# EAGLE board esplash (EAGLE 9.2.2)
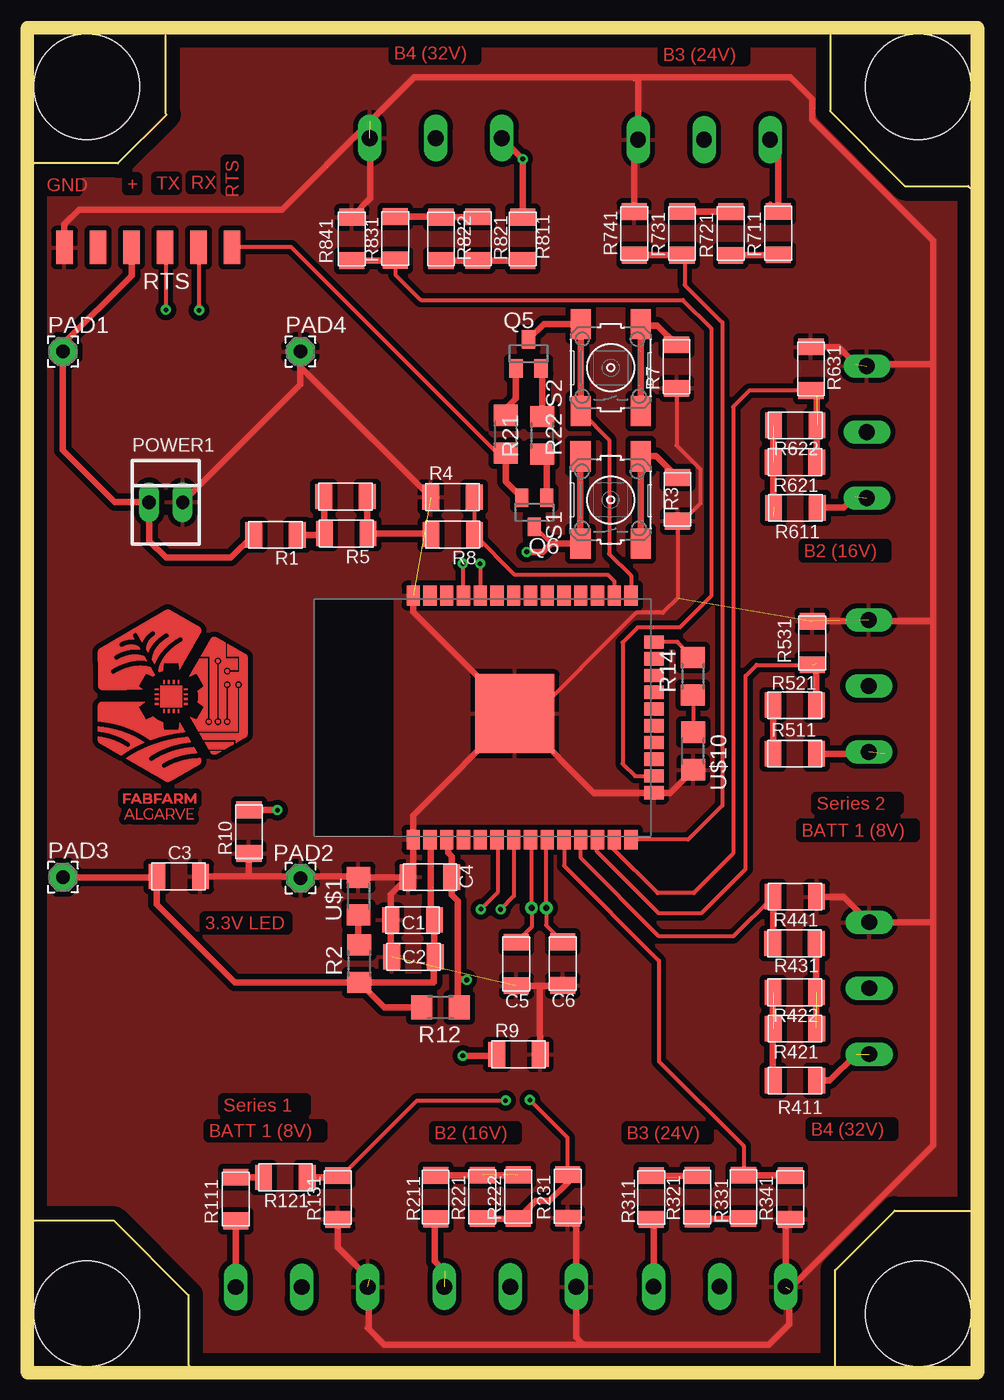
[diagram p0: board, top side]
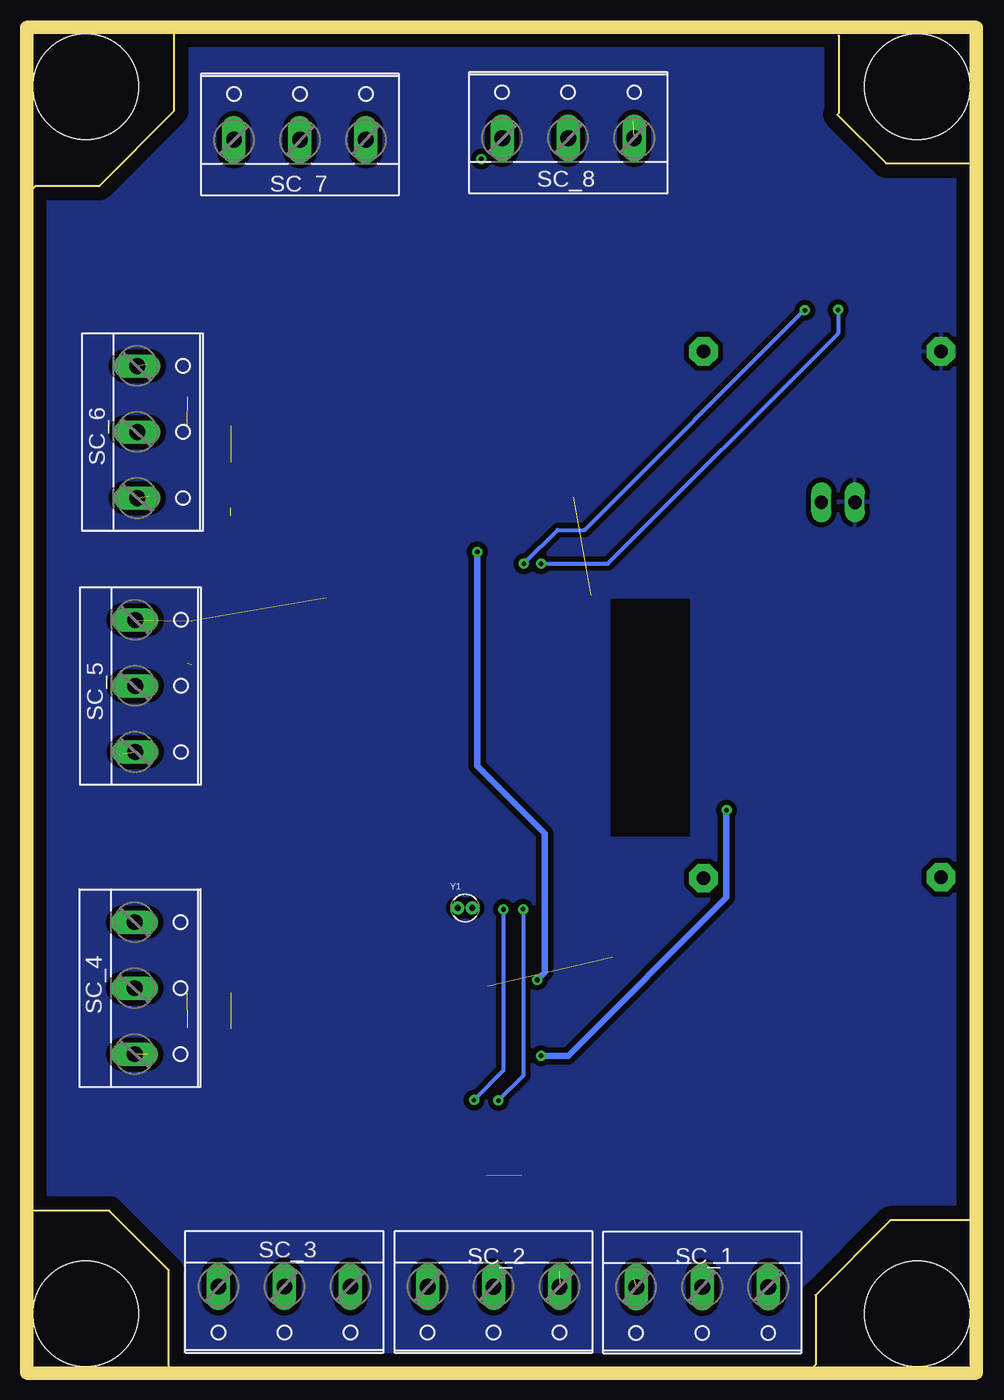
[diagram p1: board, bottom side, seen from below]

Size 71.07 x 101.07 mm. Coordinates in mm from the lower left corner, seen from the top.
Outline: 0.07,91.2 0.07,0 11.9,0
Outline: 0.07,91.2 0.07,101 71.07,101 71.07,0 60.77,0
Outline: 60.77,0 11.9,0
Outline: 60.77,0 60.77,7.3 65.29,11.81 71.07,11.81
Outline: 0,11.07 6.11,11.07 11.77,5.42 11.77,0.14 11.9,0
Outline: 10.04,100.9 10.04,94.98 10.12,94.89 6.43,91.2 0.07,91.2
Outline: 60.39,101.07 60.39,95.15 66.06,89.48 70.87,89.48 71.05,89.31
Copper layers (1*16): Top 0.035mm / dielectric 1.5mm / Bottom 0.035mm
Design rules "default *": minimum track width 12mil, minimum drill 0.35mm, track to track 0.4mm, track to pad 0.4mm, pad to pad 0.4mm, via to via 0.4mm, smd to smd 0.4mm, copper to edge 40mil, drill to drill 6mil, minimum pad ring 10mil, minimum via ring 8mil, stop-mask expansion 4mil, vias tented up to drill 0mil, thermal gap 15mil
Holes 8 mm at 4.07,4 4.07,97 67.07,97 67.07,4
Milling: 4 lines

## Footprints (pad centres in the part's own frame; a part is rotated, then mirrored left to right if it is on the bottom)
C1206FAB = smd 1.27 x 1.905: 1 -1.651,0; 2 1.651,0
2,15/1,0 = drill 1.016 pad 2.159 octagon: 1 0,0
22-23-2021 = drill 1 long: 1 -1.27,0; 2 1.27,0
SOT23 = smd 1 x 1.4: 1 -0.95,-1.1; 2 0.95,-1.1; 3 0,1.1
R1206FAB = smd 1.27 x 1.905: 1 -1.651,0; 2 1.651,0
R1206 = smd 1.6 x 1.803: 1 -1.422,0; 2 1.422,0
1X06SMD = smd 2.54 x 1.27: 1 0,6.35; 2 0,3.81; 3 0,1.27; 4 0,-1.27; 5 0,-3.81; 6 0,-6.35
6MM_SWITCH = smd 2.286 x 1.524: 1 -3.302,2.286; 2 3.302,2.286; 3 -3.302,-2.286; 4 3.302,-2.286
W237-103 = drill 1.194 long: 1 -5,-1.29; 2 0,-1.29; 3 5,-1.29
ESP-WROOM-32 = smd 1.5 x 1: 1 -9.25,7; 2 -9.25,5.73; 3 -9.25,4.46; 4 -9.25,3.19; 5 -9.25,1.92; 6 -9.25,0.65; 7 -9.25,-0.62; 8 -9.25,-1.89; 9 -9.25,-3.16; 10 -9.25,-4.43; 11 -9.25,-5.7; 12 -9.25,-6.97; 13 -9.25,-8.24; 14 -9.25,-9.51; 25 9.25,-9.51; 26 9.25,-8.24; 27 9.25,-6.97; 28 9.25,-5.7; 29 9.25,-4.43; 30 9.25,-3.16; 31 9.25,-1.89; 32 9.25,-0.62; 33 9.25,0.65; 34 9.25,1.92; 35 9.25,3.19; 36 9.25,4.46; 37 9.25,5.73; 38 9.25,7 | smd 1 x 1.5: 15 -5.7,-11.25; 16 -4.43,-11.25; 17 -3.16,-11.25; 18 -1.89,-11.25; 19 -0.62,-11.25; 20 0.65,-11.25; 21 1.92,-11.25; 22 3.19,-11.25; 23 4.46,-11.25; 24 5.73,-11.25 | smd 6 x 6: GND 0.3,-0.7
LED1206 = smd 1.6 x 1.803: 1 -1.422,0; 2 1.422,0
XTAL_ECS-.327-12.5-13X = drill 0.46 pad 0.86: 1 -0.55,0; 2 0.55,0

## Placement (x,y rotation side)
C1  10uF  [C1206FAB]  28.77,33.84 0 top
C2  100nF  [C1206FAB]  28.83,31.03 180 top
C3  1uF  [C1206FAB]  11.04,37.14 0 top
C4  1uF  [C1206FAB]  30.07,37.09 180 top
C5  15pf  [C1206FAB]  36.62,30.52 90 top
C6  15pf  [C1206FAB]  40.14,30.53 90 top
PAD1  [2,15/1,0]  2.27,76.93 0 top
PAD2  [2,15/1,0]  20.27,37.01 0 top
PAD3  [2,15/1,0]  2.26,37.09 0 top
PAD4  [2,15/1,0]  20.26,76.93 0 top
POWER1  22-23-2021  [22-23-2021]  10.07,65.5 0 top
Q5  BCX70SMD  [SOT23]  37.54,76.77 0 top
Q6  BCX70SMD  [SOT23]  37.98,64.75 180 top
R1  49.9Kohm  [R1206FAB]  18.37,63.03 180 top
R2  100ohm  [R1206]  24.73,30.54 270 top
R3  50ohm  [R1206FAB]  48.83,65.72 90 top
R4  10Kohm  [R1206FAB]  31.78,65.9 0 top
R5  100Kohm  [R1206FAB]  23.73,63.13 180 top
R6  50Kohm  [R1206FAB]  23.68,65.93 180 top
R7  50ohm  [R1206FAB]  48.76,75.79 90 top
R8  5Kohm  [R1206FAB]  31.81,63.05 180 top
R9  0 ohm  [R1206FAB]  36.78,23.65 0 top
R10  0 ohm  [R1206FAB]  16.36,40.53 90 top
R12  10k  [R1206]  30.89,27.22 0 top
R14  100ohm  [R1206]  49.99,52.33 90 top
R21  10k  [R1206]  35.82,70.67 270 top
R22  10k  [R1206]  38.58,70.57 90 top
R111  4.9Kohm  [R1206FAB]  15.35,12.7 270 top
R121  10Kohm  [R1206FAB]  19.12,14.33 180 top
R131  10Kohm  [R1206FAB]  23.1,12.82 90 top
R211  4.9Kohm  [R1206FAB]  30.5,12.84 270 top
R221  100Kohm  [R1206FAB]  34.05,12.86 90 top
R222  49.9Kohm  [R1206FAB]  36.76,12.87 90 top
R231  10Kohm  [R1206FAB]  40.51,12.9 90 top
R311  49.9Kohm  [R1206FAB]  46.84,12.81 270 top
R321  10Kohm  [R1206FAB]  50.33,12.84 90 top
R331  4.99Kohm  [R1206FAB]  53.84,12.86 270 top
R341  10Kohm  [R1206FAB]  57.37,12.82 90 top
R411  49.9Kohm  [R1206FAB]  57.74,21.67 0 top
R421  100Kohm  [R1206FAB]  57.74,25.61 180 top
R422  49.9Kohm  [R1206FAB]  57.71,28.36 180 top
R431  4.99Kohm  [R1206FAB]  57.69,32.06 0 top
R441  10Kohm  [R1206FAB]  57.72,35.61 180 top
R511  4.9Kohm  [R1206FAB]  57.72,46.44 0 top
R521  10Kohm  [R1206FAB]  57.71,50.13 180 top
R531  10Kohm  [R1206FAB]  59.03,54.83 270 top
R611  4.9Kohm  [R1206FAB]  57.76,65.09 0 top
R621  100Kohm  [R1206FAB]  57.74,68.55 180 top
R622  49.9Kohm  [R1206FAB]  57.76,71.33 180 top
R631  10Kohm  [R1206FAB]  58.94,75.62 270 top
R711  49.9Kohm  [R1206FAB]  56.46,85.91 90 top
R721  10Kohm  [R1206FAB]  52.87,85.88 270 top
R731  4.99Kohm  [R1206FAB]  49.18,85.89 90 top
R741  10Kohm  [R1206FAB]  45.55,85.89 270 top
R811  49.9Kohm  [R1206FAB]  37.1,85.46 90 top
R821  100Kohm  [R1206FAB]  33.69,85.48 270 top
R822  49.9Kohm  [R1206FAB]  30.92,85.47 270 top
R831  4.99Kohm  [R1206FAB]  27.46,85.5 90 top
R841  10Kohm  [R1206FAB]  24.15,85.46 270 top
RTS  FTDI-SMD-HEADER  [1X06SMD]  8.74,84.82 90 top
S1  Reset  [6MM_SWITCH]  43.77,65.69 90 top
S2  GPIO0 Button  [6MM_SWITCH]  43.77,75.71 90 top
SC_1  SC  [W237-103]  20.36,4.74 180 bottom
SC_2  SC  [W237-103]  36.17,4.76 180 bottom
SC_3  SC  [W237-103]  52.02,4.77 180 bottom
SC_4  SC  [W237-103]  62.08,28.67 270 bottom
SC_5  SC  [W237-103]  62.04,51.59 270 bottom
SC_6  SC  [W237-103]  61.89,70.83 270 bottom
SC_7  SC  [W237-103]  50.85,94.27 0 bottom
SC_8  SC  [W237-103]  30.52,94.4 0 bottom
U1  ESP-WROOM-32  [ESP-WROOM-32]  35.8,49.18 90 top
U$1  LED  [LED1206]  24.66,35.65 90 top
U$10  LED  [LED1206]  50.02,46.65 270 top
Y1  ECS-.327-12.5-13X  [XTAL_ECS-.327-12.5-13X]  38.33,34.75 0 bottom

## Library data of the parts
C1-C6 R1-R10 R12 R14 R21 R22 R111 R121 R131 R211 R221 R222 R231 R311 R321 R331 R341 R411 R421 R422 R431 R441 R511 R521 R531 R611 R621 R622 R631 R711 R721 R731 R741 R811 R821 R822 R831 R841 RTS S1 S2 U$1 U$10 = fab
PAD1-PAD4 = wirepad
POWER1 = con-molex; MF: MOLEX; MPN: 22-23-2021; OC_FARNELL: 1462926; OC_NEWARK: 25C3832
Q5 Q6 = transistor
SC_1-SC_8 = con-wago-500; MPN: 237-103; OC_FARNELL: unknown; OC_NEWARK: 18M7116
U1 = esp32
Y1 = ECS-.327-12.5-13X; AVAILABILITY: Unavailable; DESCRIPTION: 32.768kHz ±20ppm Crystal 12.5pF 35 kOhms Cylindrical Can, Radial; MF: ECS Inc.; MP: ECS-.327-12.5-13X; PACKAGE: Cylindrical Can Radial ECS International; PRICE: None

## Nets
3V3: C1.2 C2.1 C3.1 PAD3.1 R2.2 R12.1 U1.2
32K_XN: C6.2 U1.9 Y1.1
32K_XP: C5.2 U1.8 Y1.2
CHIP_PU: C4.1 Q6.3 R12.2 S1.1 S1.2 U1.3
DTR: Q5.2 R22.2
GND: C1.1 C2.2 C3.2 C4.2 C5.1 C6.1 PAD2.1 PAD4.1 POWER1.2 R3.1 R4.1 R7.1 R9.2 R10.1 R131.1 R231.1 R341.1 R441.1 R531.1 R631.1 R741.1 R841.1 RTS.1 SC_1.3 SC_2.3 SC_3.3 SC_4.1 SC_5.1 SC_6.1 SC_7.3 SC_8.3 U1.1 U1.15 U1.38 U1.GND U$1.2 U$10.2
GPIO0: Q5.3 S2.1 S2.2 U1.25
GPIO1/TXD0: RTS.4 U1.35
GPIO02: R14.2 U1.24
GPIO3/RXD0: RTS.5 U1.34
GPIO4/POWER_VOLT_IN: R4.2 R8.1 U1.26
GPIO12/BATT_IN_7: R731.1 R741.2 U1.14
GPIO13/BATT_IN_8: R831.1 R841.2 U1.16
GPIO14/BATT_IN_6: R621.1 R622.1 R631.2 U1.13
GPIO25/BATT_IN_3: R331.1 R341.2 U1.10
GPIO26/BATT_IN_4: R431.1 R441.2 U1.11
GPIO27/BATT_IN_5: R521.1 R531.2 U1.12
GPIO34/BATT_IN_1: R121.1 R131.2 U1.6
GPIO35/BATT_IN_2: R221.1 R222.1 R231.2 U1.7
N$2: R1.1 R5.2 R6.2
N$6: R3.2 S1.3 S1.4
N$8: R111.1 R121.2
N$10: R14.1 U$10.1
N$12: R111.2 SC_1.1
N$13: R5.1 R6.1 R8.2
N$14: R211.2 SC_2.1
N$16: R611.2 SC_6.3
N$18: R9.1 R10.2
N$19: R2.1 U$1.1
N$20: R211.1 R221.2 R222.2
N$21: R7.2 S2.3 S2.4
N$22: R311.2 SC_3.1
N$24: R311.1 R321.2
N$26: Q5.1 R21.1
N$30: R321.1 R331.2
N$32: R411.2 SC_4.3
N$33: R411.1 R421.2 R422.2
N$34: Q6.1 R22.1
N$35: R421.1 R422.1 R431.2
N$37: R511.1 R521.2
N$38: R511.2 SC_5.3
N$42: R611.1 R621.2 R622.2
N$43: R711.2 SC_7.1
N$44: R711.1 R721.2
N$46: R721.1 R731.2
N$47: R811.2 SC_8.1
N$48: R811.1 R821.2 R822.2
N$49: R821.1 R822.1 R831.2
RTS: Q6.2 R21.2 RTS.6
VCC: PAD1.1 POWER1.1 R1.2 RTS.3

## Tracks (layer width: path | path; a pad name or v marks a point on that pad's centre or on a via)
3V3
  Top 0.305: 30.12,39.89 U1.2 29.86,40.15
  Top 0.508: PAD3.1 9.34,37.09 C3.1 9.39,35.02 15.29,29.11 R2.2 | 30.12,39.89 30.12,34.13 C1.2 30.42,31.1 C2.1 30.38,30.93 30.38,29.11 R2.2 | R12.1 26.63,27.22 R2.2
32K_XN
  Top 0.305: C6.2 38.88,33.44 Y1.1 38.88,39.85 U1.9
32K_XP
  Top 0.305: C5.2 37.78,33.32 Y1.2 37.78,39.85 U1.8
CHIP_PU  (via drill 0.35)
  Top 0.305: 31.32,39.95 U1.3 | 41.48,61.5 S1.1 | Q6.3 39.25,62.38
  Top 0.508: S1.2 S1.1 39.25,62.38 38.61,61.74 v37.41,61.74 | 31.32,39.95 31.46,39.82 31.46,38.91 31.72,38.65 C4.1 31.72,35.76 32.19,35.29 32.19,29.34 | 32.19,29.34 32.19,27.34 R12.2 | v32.86,29.31 32.83,29.34 32.19,29.34
  Bottom 0.508: v32.86,29.31 32.3,29.87 32.3,40.4 37.43,45.53 37.43,61.73 v37.41,61.74
DTR
  Top 0.305: Q5.2 38.88,75.27
  Top 0.508: R22.2 38.58,75.58 Q5.2
GND  (8 unrouted)
  Top 0.305: R7.1 48.76,69.81 50.57,68.01 50.57,65.42 49.22,64.07 R3.1 48.84,58.24 47.72,57.13 45.7,57.13 37.28,48.71
  Top 0.508: C2.2 27.11,31.1 C1.1 27.11,35.79 C4.2 | C4.2 28.8,37.48 U1.1 28.8,41.78 U1.GND | C3.2 16.39,37.13 | 16.39,37.13 20.15,37.13 | 20.15,37.13 24.6,37.13 U$1.2 28.4,37.07 C4.2 | U1.GND 37.28,48.71 42.5,43.48 U1.15 48.27,43.48 U$10.2 | U1.38 28.8,57.19 U1.GND | R4.1 20.26,75.77 PAD4.1 20.26,74.43 POWER1.2 | RTS.1 2.38,86.58 3.5,87.69 18.89,87.69 25.57,94.38 | 25.57,94.38 28.9,97.7 45.61,97.7 | 45.61,97.7 57.38,97.7 59.03,96.06 59.03,94.51 68.21,85.33 68.21,75.85 | 68.21,75.85 68.21,56.53 | 68.21,56.53 68.21,33.64 | 68.21,33.64 68.21,16.75 57.29,5.84 57.29,3.19 55.74,1.64 41.74,1.64 | 25.44,6.7 25.44,3.01 25.35,2.92 26.63,1.64 41.74,1.64 | 25.44,6.84 25.44,6.7 | 25.44,6.7 25.5,6.64 | 25.44,6.7 23.1,9.04 R131.1 | R231.1 41.17,10.59 SC_2.3 41.17,2.21 41.74,1.64 | SC_3.3 57.02,10.82 R341.1 | R441.1 61.43,35.61 SC_4.1 63.4,33.64 68.21,33.64 | 68.21,56.53 68.16,56.48 R531.1 | R631.1 61.04,77.27 62.35,75.96 68.1,75.96 68.21,75.85 | 45.55,97.64 45.61,97.7 | R841.1 25.57,88.53 25.57,94.38 | C5.1 38.4,28.87 | 38.4,28.87 40.12,28.87 C6.1 | R9.2 38.4,26.59 38.4,28.87 | R10.1 16.36,37.16 16.39,37.13 | R741.1 45.55,92.68 SC_7.3 45.85,97.47 45.61,97.7 | PAD2.1 20.15,37.13
  pour Top: -17.44,-38.93 77.18,-38.93 77.18,149.65 -17.44,149.65
GPIO0
  Top 0.305: S2.1 43.66,70.24 43.66,61.59 45.31,59.94 U1.25
  Top 0.508: Q5.3 38.69,79.01 S2.2 S2.1
GPIO1/TXD0  (via drill 0.35)
  Top 0.305: 32.4,58.65 U1.35 | U1.35 32.71,58.34 | v32.57,60.85 32.57,58.48 U1.35 | RTS.4 10.06,84.76 10.06,80.1 v10.07,80.09
  Bottom 0.305: v32.57,60.85 27.51,60.85 10.07,78.29 v10.07,80.09
GPIO02
  Top 0.305: 47.68,54.91 47.16,54.91 | 47.16,54.91 U1.24 48.83,54.91 R14.2 | 47.38,54.7 47.16,54.91
GPIO3/RXD0  (via drill 0.35)
  Top 0.305: 12.55,84.29 RTS.5 12.58,84.79 v12.58,80.07 v12.58,80.06 | 34.1,58.22 U1.34 33.88,58.44 v33.88,60.85
  Bottom 0.305: v12.58,80.06 12.62,80.06 29.27,63.41 31.31,63.41 v33.88,60.85
GPIO4/POWER_VOLT_IN
  Top 0.305: 43.83,58.22 U1.26 44.04,59.53 43.57,60 36.51,60 R8.1 | 33.45,63.06 R8.1 | R8.1 33.46,65.87
  Top 0.508: R4.2 33.46,65.87
GPIO12/BATT_IN_7
  Top 0.305: R731.1 49.37,84.05 49.37,81.98 52.23,79.12 52.23,42.52 49.64,39.94 U1.14
  Top 0.508: R741.2 R731.1 49.37,84.05
GPIO13/BATT_IN_8
  Top 0.305: 24.19,83.85 R841.2 | U1.16 45.61,44.76 44.68,45.68 44.68,54.89 45.81,56.02 49,56.02 51.38,58.39 51.38,78.69 49.24,80.83 29.38,80.83 27.46,82.75 27.46,83.64 R831.1
  Top 0.508: R841.2 27.29,83.81 27.46,83.64
GPIO14/BATT_IN_6  (1 unrouted)
  Top 0.305: 59.39,71.31 R622.1 | 59.41,73.51 R631.2 54.28,73.97 53.05,72.74 53.05,38.88 50.07,35.89 47.33,35.89 43.94,39.28 43.94,39.83 U1.13
  Top 0.508: R631.2 59.39,73.53 R621.1
GPIO25/BATT_IN_3
  Top 0.305: 53.88,14.47 R331.1 53.84,16.72 47.42,23.14 47.42,30.76 40.23,37.95 U1.10 40.2,39.97 | R341.2
  Top 0.508: R331.1 57.33,14.51 R341.2
GPIO26/BATT_IN_4
  Top 0.305: 56.04,35.58 R441.2 53.07,32.61 47.43,32.61 41.5,38.53 U1.11 | R431.1 55.82,31.84
  Top 0.508: R441.2 56.07,32.09 R431.1
GPIO27/BATT_IN_5  (1 unrouted)
  Top 0.305: 59.36,53.29 59.53,53.45 59.56,53.41 59.56,53.27 59.48,53.18 | U1.12 42.72,39.88 42.72,39.04 47.41,34.34 50.62,34.34 53.99,37.72 53.99,52.34 54.84,53.18 R531.2
  Top 0.508: R521.1 59.36,53.07 59.56,53.27
GPIO34/BATT_IN_1  (via drill 0.35)
  Top 0.305: U1.6 35.2,39.89 35.2,35.92 v33.94,34.66 | R131.2 23.4,14.47 29.1,20.16 v35.8,20.16
  Top 0.508: 20.72,14.29 R121.1 22.96,14.33 R131.2
  Bottom 0.305: v35.8,20.16 33.92,22.05 33.92,34.64 v33.94,34.66
GPIO35/BATT_IN_2  (via drill 0.35)
  Top 0.305: 37.18,11.63 R222.1 | R221.1 | U1.7 36.43,35.65 v35.42,34.65 | R231.2 40.51,17.34 v37.65,20.2
  Top 0.508: R231.2 40.51,13.94 39.12,12.55 38.1,12.55 R222.1 36.76,11.21 R221.1
  Bottom 0.305: v35.42,34.65 35.42,22.43 v37.65,20.2
N$2
  Top 0.305: 21.98,63.03 R5.2 | 20.04,63.06 R1.1
  Top 0.508: R1.1 21.98,63.03 | R5.2 22.08,65.88 R6.2
N$6
  Top 0.508: S1.3 S1.4 47.22,68.99 R3.2
N$8
  Top 0.508: 15.4,14.41 R111.1 17.45,14.35 R121.2
N$10
  Top 0.305: R14.1 50.02,50.88 U$10.1
N$12
  Top 0.508: R111.2 SC_1.1
N$13
  Top 0.508: R8.2 30.08,63.13 R5.1 25.33,63.18 R6.1
N$14  (1 unrouted)
  Top 0.508: R211.2 30.43,11.12 30.43,7.97 31.2,7.21 31.2,4.75 31.18,4.73
N$16  (1 unrouted)
  Top 0.305: 59.46,65.94 59.34,65.81 59.3,65.81 | 59.3,65.81 59.25,65.86 | 59.3,65.81 59.41,65.7 R611.2
  Top 0.508: R611.2 61.44,65.09 62.29,65.94 64.2,65.94 64.23,65.97
N$18  (via drill 0.35)
  Top 0.508: R10.2 18.5,42.19 v18.52,42.17 | 32.66,23.65 v32.57,23.56 35.04,23.56 R9.1
  Bottom 0.508: v18.52,42.17 18.53,42.16 18.53,35.55 30.52,23.56 v32.57,23.56
N$19
  Top 0.508: U$1.1 24.66,32.02 R2.1
N$20  (1 unrouted)
  Top 0.305: 34.05,14.52 R221.2 | 30.52,14.51 R211.1
  Top 0.508: R211.1 36.73,14.49 R222.2
N$21
  Top 0.508: S2.3 46.06,78.89 | 46.06,78.89 S2.4 | R7.2 47.31,78.89 46.06,78.89
N$22
  Top 0.508: R311.2 47.02,10.98 SC_3.1 47.02,4.57 47.04,4.55
N$24
  Top 0.305: 46.87,14.49 R311.1
  Top 0.508: R311.1 50.3,14.47 R321.2
N$26
  Top 0.305: Q5.1 36.72,75.53 | 35.78,72.56 35.47,72.25 35.66,72.25 R21.1
  Top 0.508: Q5.1 36.59,73.37 35.47,72.25
N$30
  Top 0.305: 50.35,11.21 R321.1
  Top 0.508: R321.1 53.82,11.19 R331.2
N$32  (1 unrouted)
  Top 0.508: R411.2 60.38,21.67 62.38,23.67
N$33  (1 unrouted)
  Top 0.305: R421.2 | 56.09,28.33 R422.2
  Top 0.508: R422.2 56.06,21.7 R411.1
N$34
  Top 0.305: Q6.1 39.16,66.08
  Top 0.508: R22.1 38.93,68.79 Q6.1
N$35  (1 unrouted)
  Top 0.305: 59.36,25.63 R421.1 | 59.36,32.04 R431.2
  Top 0.508: R431.2 59.34,25.65 R421.1
N$37
  Top 0.508: R511.1 R521.2
N$38  (1 unrouted)
  Top 0.508: R511.2 64.53,46.44 64.69,46.28 64.72,46.31 64.72,46.55
N$42  (2 unrouted)
  Top 0.305: 56.11,68.53 R621.2 | 56.09,71.31 R622.2
  Top 0.508: R622.2 56.11,64.46
N$43
  Top 0.305: 55.85,88.17 R711.2
  Top 0.508: R711.2 56.46,92.37 SC_7.1
N$44
  Top 0.305: 52.9,84.25 R721.2
  Top 0.508: R721.2 56.43,84.22 R711.1
N$46
  Top 0.305: 49.19,87.53 R731.2
  Top 0.508: R731.2 52.85,87.54 R721.1
N$47  (via drill 0.35)
  Top 0.508: R811.2 v37.1,91.53 SC_8.1
N$48
  Top 0.305: R821.2 33.71,83.81 33.87,83.81 33.87,83.82
  Top 0.508: R822.2 33.87,83.82 | R811.1 33.87,83.81
N$49
  Top 0.305: 30.93,87.14 R822.1 | 27.49,87.12 R831.2
  Top 0.508: R831.2 30.91,87.15 30.93,87.14 | R822.1 33.68,87.12 R821.1
RTS
  Top 0.305: 36.35,69.25 R21.2 35.18,69.25 19.56,84.86 15.13,84.86 RTS.6
  Top 0.508: R21.2 35.82,67.06 Q6.2
VCC
  Top 0.305: PAD1.1
  Top 0.508: RTS.3 7.46,82.69 2.27,77.5 PAD1.1 2.27,69.45 6.21,65.5 POWER1.1 8.8,62.58 10.08,61.3 14.98,61.3 R1.2
  pour Bottom: -13.13,-30.77 -13.13,146.01 77.18,146.01 77.18,-30.77
(copper drawn outside any net)
  shapes: Top area x14404

## Text on the board
Top: B4 (32V) | B3 (24V) | RTS | GND | + | TX | RX | B2 (16V) | Series 2 | BATT 1 (8V) | 3.3V LED | Series 1 | BATT 1 (8V) | B2 (16V) | B3 (24V) | B4 (32V)